# Altium PCB Power.PcbDoc
Units mil, origin at the board's own origin, x right, y up, seen from the top; angles counter-clockwise.
Board outline 1300 x 1300 mil, 2 copper layers (Top Layer, Bottom Layer); 24 components, 14 nets, 60 pads, 0 vias.
Unrouted connection lines stored in the file: 43.
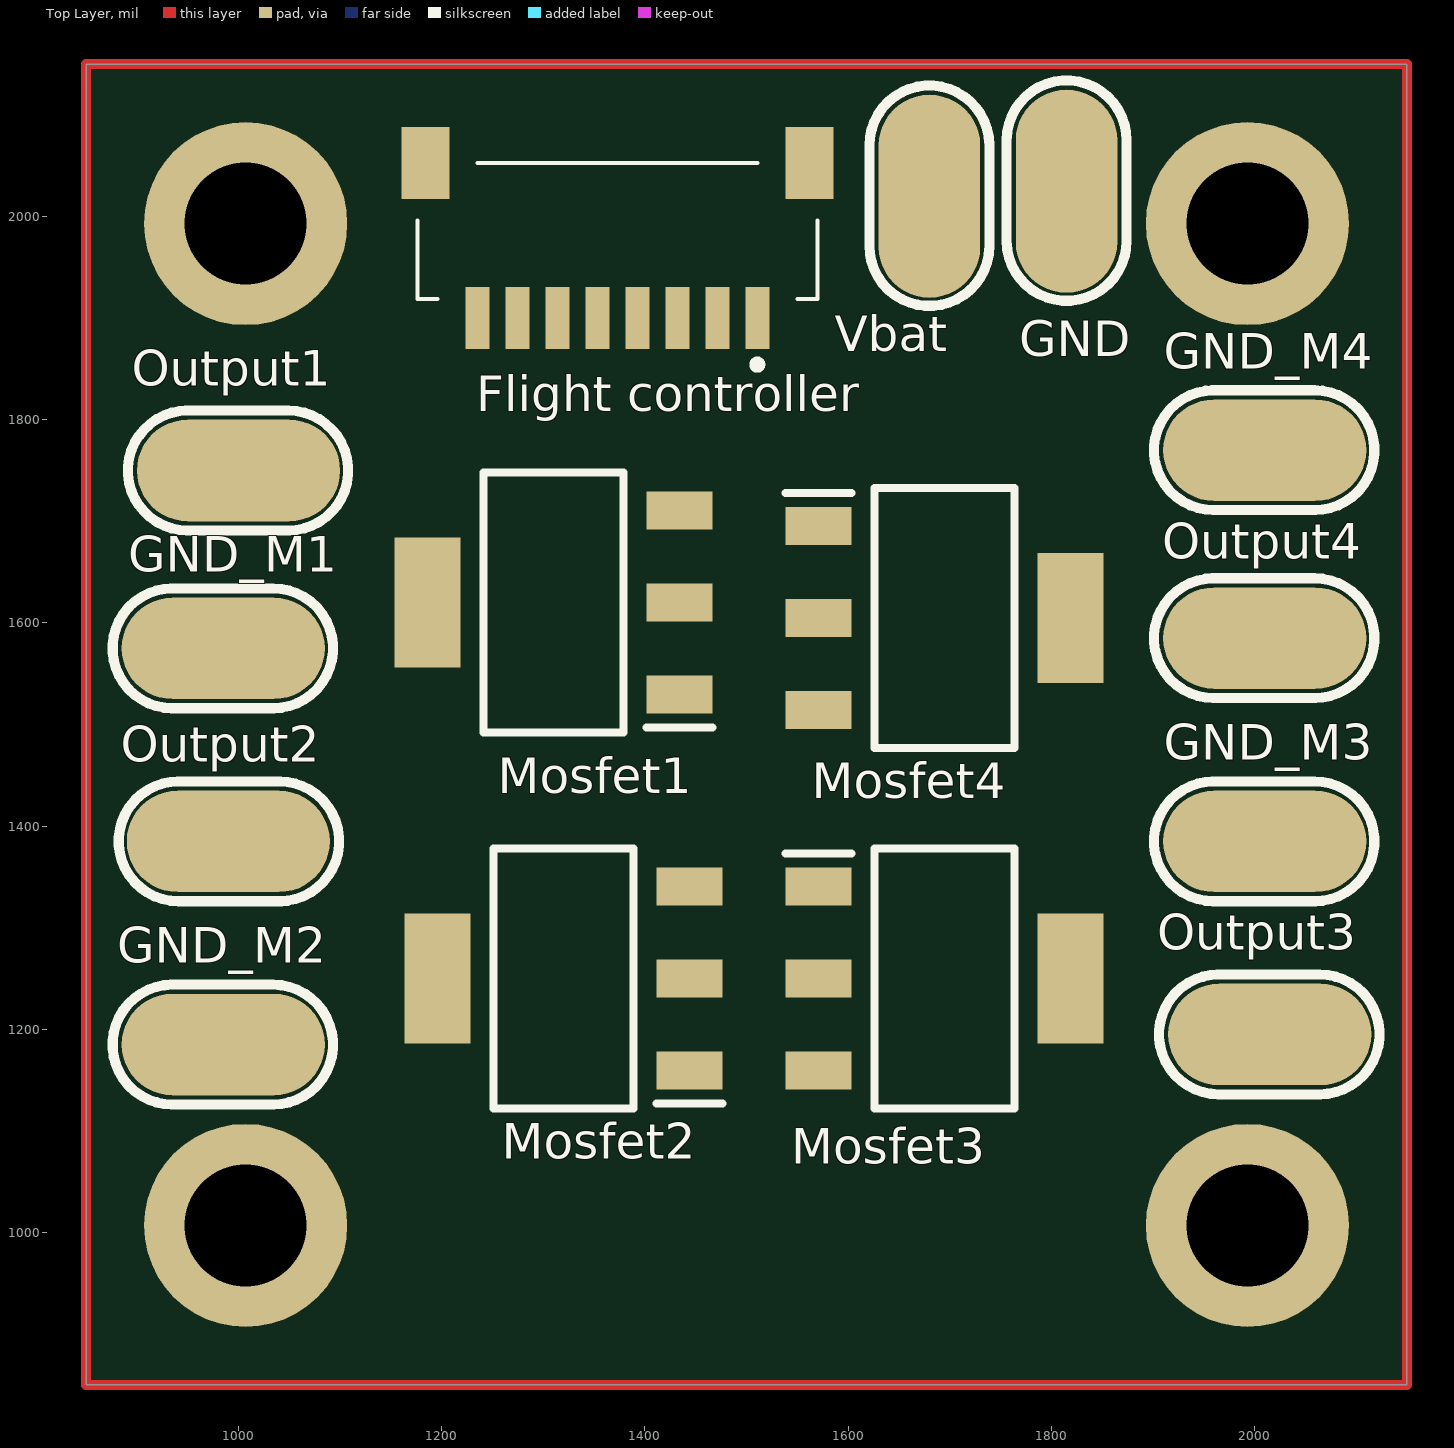
[diagram p0: Top Layer view]
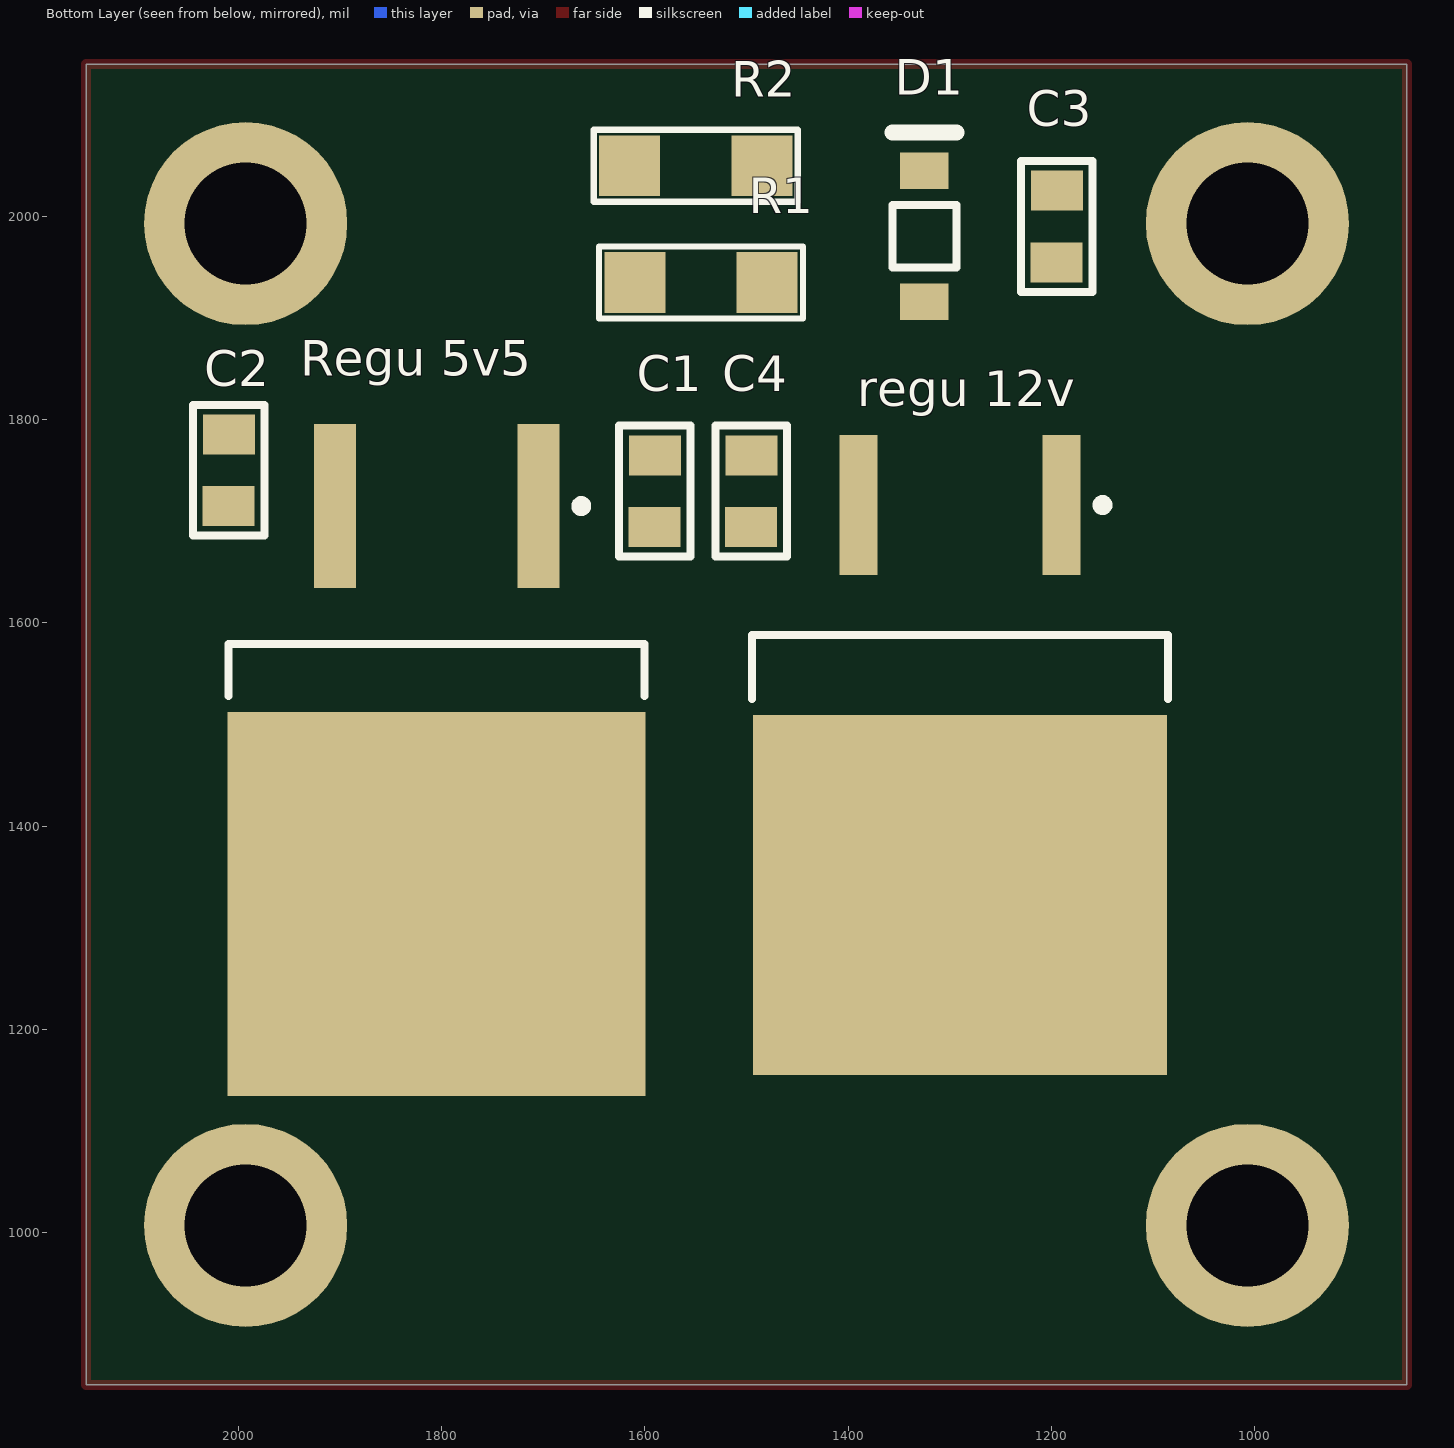
[diagram p1: Bottom Layer view, seen from below]

## Layer stack, top to bottom
Top Solder: solder mask 0.4, Solder Resist, Dk 3.5
Top Layer: signal copper 1.4
Dielectric 1: dielectric 12.6, FR-4, Dk 4.8
Bottom Layer: signal copper 1.4
Bottom Solder: solder mask 0.4, Solder Resist, Dk 3.5

## Board outline
850,850 850,2150 2150,2150 2150,850

## Design rules (kind name [scope] priority, off if disabled: settings)
Clearance [All] p1: gap=10 ignorepadtopadclearanceinfootprint=FALSE except(0: Arc-Hole Track-Hole SMDPad-Hole THPad-Hole Via-Hole Fill-Hole Poly-Hole Region-Hole Text-Hole)
PolygonConnect [All] p1: connectstyle=Relief reliefconductorwidth=10 reliefentries=4 polygonreliefangle="90 Angle" airgapwidth=10
RoomDefinition Power [InComponentClass('Power')] p1: confinementstyle=ConfineIn formatcopy=TRUE lockcomponents=FALSE outline 685,0 5025,0 5025,840 685,840
RoutingVias [All] p1: holewidth=28 width=50 viastyle="Through Hole" minholewidth=28 minwidth=50 maxholewidth=28 maxwidth=50
SolderMaskExpansion [All] p1: expansion=4 istentingtop=FALSE
Width [All] p1: maxlimit=10 minlimit=10 preferedwidth=10
30 further rules are at their usual default settings.

## Components (designator, comment, footprint, x,y, rotation, side; value= is the part's Value field where it differs from the comment)
C1 "CMS_0805" CONDENSATEUR_CMS_0805 1590,1765 r270 bottom value=330nF
C2 "CMS_0805" CONDENSATEUR_CMS_0805 2009.61,1785.47 r270 bottom value=100nF
C3 "CMS_0805" CONDENSATEUR_CMS_0805 1195,1955 r90 bottom value=330nF
C4 "CMS_0805" CONDENSATEUR_CMS_0805 1495,1765 r270 bottom value=100nF
D1 "MBR0520LT1G" ONSC-SOD-123-2-425-04_V 1325,1980.63 r90 bottom
"Flight controller" "SM08B-SRSS-TB__LF__SN_" SM08BSRSSTBLFSN 1372.8,1976.3 r180 top
GND "Pad_CMS" PAD_CMS_5.08x2.54 1815,2025 r90 top
GND_M1 "Pad_CMS" PAD_CMS_5.08x2.54 985,1575 r180 top
GND_M2 "Pad_CMS" PAD_CMS_5.08x2.54 985,1185 r180 top
GND_M3 "Pad_CMS" PAD_CMS_5.08x2.54 2010,1385 r180 top
GND_M4 "Pad_CMS" PAD_CMS_5.08x2.54 2010,1770 r180 top
Mosfet1 "STN3NF06L" SOT230P700X190-4N 1310,1620 r180 top
Mosfet2 "STN3NF06L" SOT230P700X190-4N 1320,1250 r180 top
Mosfet3 "STN3NF06L" SOT230P700X190-4N 1695,1250 r0 top
Mosfet4 "STN3NF06L" SOT230P700X190-4N 1695,1605 r0 top
Output1 "Pad_CMS" PAD_CMS_5.08x2.54 1000,1750 r180 top
Output2 "Pad_CMS" PAD_CMS_5.08x2.54 990,1385 r0 top
Output3 "Pad_CMS" PAD_CMS_5.08x2.54 2015,1195 r180 top
Output4 "Pad_CMS" PAD_CMS_5.08x2.54 2010,1585 r180 top
R1 "RESISTANCE_CMS_1206" RESISTANCE_CMS_1206 1480,1935 r0 bottom value=1K
R2 "RESISTANCE_CMS_1206" RESISTANCE_CMS_1206 1485,2050 r0 bottom value=7K
"Regu 5v5" "L7805ABD2T-TR" TO-263_M 1805,1465 r270 bottom
"regu 12v" "L7812ABD2T-TR" TO-263_L 1290,1470 r270 bottom
Vbat "Pad_CMS" PAD_CMS_5.08x2.54 1680,2020 r90 top

## Footprints (in the part's own frame and the unit in brackets; to place one, negate y for a bottom-side part, rotate by r counter-clockwise, add the part's x,y. Pads: shape width x height; smd on the part's side, far side on the other; paste and mask are expansions set on the pad)
CONDENSATEUR_CMS_0805 [mm] "CONDENSATEUR CMS 0805 ; DIMENSIONS : 2mm x 1.25mm"
  rect 1x1.3 smd: 1(0,0) 2(1.79,-0.01)
  silkscreen extent -0.74,-0.9 2.53,0.89, body extent -0.09,-0.67 1.91,0.64, height 0.73
ONSC-SOD-123-2-425-04_V [mm] "SOD, 2-Leads, Body 2.69x1.6mm"
  rect 0.91x1.22 smd: 1(-1.635,0) 2(1.635,0)
  silkscreen extent -0.78,-0.8 2.59,0.8, body extent -1.35,-0.8 1.35,0.8, height 1.35
PAD_CMS_5.08x2.54 [mil] "Pad pour souder un fil"
  oval 200x100 smd paste+0.2: 1(0,0)
  silkscreen extent -108,-59 109,59, body extent -85,-30 84,30, height 10
RESISTANCE_CMS_1206 [mil] "RESISTANCE CMS 1206 ; DIMENSIONS : 3.2mm x 1.6mm"
  rect 60x60 smd: 1(0,0) 2(130,0)
  silkscreen extent -35,-35 165,35, body extent 0,-31 126,31, height 39
SM08BSRSSTBLFSN [mm]
  rect 0.6x1.55 smd: 1(-3.5,1.938) 2(-2.5,1.938) 3(-1.5,1.938) 4(-0.5,1.938) 5(0.5,1.938) 6(1.5,1.938) 7(2.5,1.938) 8(3.5,1.938)
  rect 1.2x1.8 smd: MP1(-4.8,-1.938) MP2(4.8,-1.938)
  silkscreen extent -5,-1.94 5,3.2, body extent -5.28,-2.72 5.28,2.65, height 3
SOT230P700X190-4N [mm]
  rect 1.65x0.95 smd: 1(-3.15,2.3) 2(-3.15,0) 3(-3.15,-2.3)
  rect 1.65x3.25 smd: 4(3.15,0)
  silkscreen extent -3.98,-3.25 1.75,3.25, body extent -3.5,-3.25 3.5,3.25, height 1.9
TO-263_L [mm] "D2-PAK, 4-Leads, Body 9.2x10.2mm, Pitch 2.54mm, Lead Span 15.4mm, IPC High Density"
  rect 3.5x0.95 smd: 1(-6.25,2.54) 3(-6.25,-2.54)
  rect 9x10.35 smd: 4(3.5,0)
  silkscreen extent -6.37,-5.2 -1.4,5.2, body extent -3,-5.2 6.35,5.2, height 4.6
TO-263_M [mm] "D2-PAK, 4-Leads, Body 9.2x10.2mm, Pitch 2.54mm, Lead Span 15.4mm, IPC Low Density"
  rect 4.1x1.05 smd: 1(-6.35,2.54) 3(-6.35,-2.54)
  rect 9.6x10.45 smd: 4(3.6,0)
  silkscreen extent -6.47,-5.2 -1.6,5.2, body extent -2.9,-5.2 6.45,5.2, height 4.6

## Part data
C1 C2 C3 C4: library part CONDENSATEUR_CMS_CER_0805, "CONDENSATEUR CMS CERAMIQUE 0805", Type=CMS_0805
D1: library part CMP-004-00003-1, "Schottky Power Rectifier, 20 V, 5.5 A, -65 to 125 degC, 2-Pin SMD, RoHS, Tape and Reel", Case/Package=SOD, Forward Current=5dA, Forward Voltage=3.85dV, Manufacturer="ON Semiconductor", Max Operating Temperature=125°C, Max Surge Current=5.5A, Min Operating Temperature=-65°C, Package Description="2-Pin Surface Mount Device, Body 2.69 x 1.6 mm", Package Quantity=3000, Package Reference=SOD-123-2-425-04, Peak Reverse Current=250uA, Datasheet URL=http://www.onsemi.cn/pub_link/Collateral/MBR0520LT1-D.PDF, Datasheet Version="Rev. 6, 01/2012", Elements=1, Manufacturer URL=http://www.onsemi.com/, Mounting Technology=SM, Packaging=TapeandReel, Pins=2, RoHS Compliant=True
"Flight controller": "Connector", Arrow Part Number="SM08B-SRSS-TB (LF)(SN)", Manufacturer_Name="JST (JAPAN SOLDERLESS TERMINALS)", Arrow Price/Stock=https://www.arrow.com/en/products/sm08b-srss-tb-lf-sn/jst-manufacturing, Datasheet Link=http://docs-emea.rs-online.com/webdocs/082f/0900766b8082f545.pdf, Height=2.9mm, Manufacturer_Part_Number="SM08B-SRSS-TB (LF)(SN)"
GND GND_M1 GND_M2 GND_M3 GND_M4 Output1 Output2 Output3 Output4 Vbat: "Pad pour souder un fil", LatestRevisionNote="Mech Layer 1 removed.", PackageReference=PAD_CMS, Publisher="Damien Guitton"
Mosfet1 Mosfet2 Mosfet3 Mosfet4: "MOSFET (N-Channel)", Manufacturer_Name=STMicroelectronics, Mouser Part Number=511-STN3NF06L, Datasheet Link=https://www.st.com/resource/en/datasheet/stn3nf06l.pdf, Height=1.9mm, Manufacturer_Part_Number=STN3NF06L, Mouser Price/Stock=https://www.mouser.co.uk/ProductDetail/STMicroelectronics/STN3NF06L?qs=VREXnN%2FAp%252BtujmZVCVKGgA%3D%3D
R1 R2: "RESISTANCE CMS 1206", Type=CMS_1206
"Regu 5v5": library part CMP-0244-00199-1, "Positive Voltage Regulator, 3-Pin D2PAK, Tape and Reel", ComponentLink1Description="Manufacturer URL", ComponentLink1URL=http://www.st.com, ComponentLink2Description=Datasheet, ComponentLink2URL=http://www.st.com/internet/com/TECHNICAL_RESOURCES/TECHNICAL_LITERATURE/DATASHEET/CD00000444.pdf, DatasheetVersion=16/11/2011, PackageDescription="3-Pin Transistor Outline Package 2.54 mm Pitch, 15.4 mm Lead Span (D2PAK)", PackageReference=TO-263, PackageVersion=2011
"regu 12v": library part CMP-0244-00181-1, "Positive Voltage Regulator, 3-Pin D2PAK, Tape and Reel", ComponentLink1Description="Manufacturer URL", ComponentLink1URL=http://www.st.com, ComponentLink2Description=Datasheet, ComponentLink2URL=http://www.st.com/internet/com/TECHNICAL_RESOURCES/TECHNICAL_LITERATURE/DATASHEET/CD00000444.pdf, DatasheetVersion=16/11/2011, PackageDescription="3-Pin Transistor Outline Package 2.54 mm Pitch, 15.4 mm Lead Span (D2PAK)", PackageReference=TO-263, PackageVersion=2011

## Free pads (board coordinates)
  round 200 hole 120: 2(1007,1007) 2(1007,1993) 2(1993,1007) 2(1993,1993)

## Nets (pads, with @x,y where several pads share a name; then routed paths per layer and width w, separated by ;. In a path a pad name is that pad's centre, name@x,y a point inside that pad or via, vN(x,y) a via of type N, cw(c..) or ccw(c..) an arc to the next point about the centre after c; other vN are vias at no path point)
5Vin: "Flight controller.1" "Regu 5v5.3" C2.1
12v: "Regu 5v5.1" "regu 12v.3" C1.1 C4.1
ADC1_IN13: "Flight controller.8" R1.2 R2.1
GND: "Flight controller.2" "Regu 5v5.4" "regu 12v.4" C1.2 C2.2 C3.2 C4.2 GND.1 GND_M1.1 GND_M2.1 GND_M3.1 GND_M4.1 Mosfet1.2 Mosfet1.4 Mosfet2.2 Mosfet2.4 Mosfet3.2 Mosfet3.4 Mosfet4.2 Mosfet4.4 pad.2 R1.1
NetC3_1: "regu 12v.1" C3.1 D1.2
Output1: Mosfet1.3 Output1.1
Output2: Mosfet2.3 Output2.1
Output3: Mosfet3.3 Output3.1
Output4: Mosfet4.3 Output4.1
TIM1_CH1: "Flight controller.6" Mosfet1.1
TIM1_CH2: "Flight controller.5" Mosfet2.1
TIM1_CH3: "Flight controller.4" Mosfet3.1
TIM1_CH4: "Flight controller.3" Mosfet4.1
V_bat: D1.1 R2.2 Vbat.1
pads on no net: "Flight controller.7" "Flight controller.MP1" "Flight controller.MP2"
copper on no net: | length 5200
  Top Layer w10: 850,850 2150,850 2150,2150 850,2150 850,850